# Altium PCB PCB1.PcbDoc
Units mm, origin at the board's own origin, x right, y up, seen from the top; angles counter-clockwise.
Board outline 59 x 63 mm, 2 copper layers (Top Layer, Bottom Layer); 26 components, 22 nets, 84 pads, 24 vias.
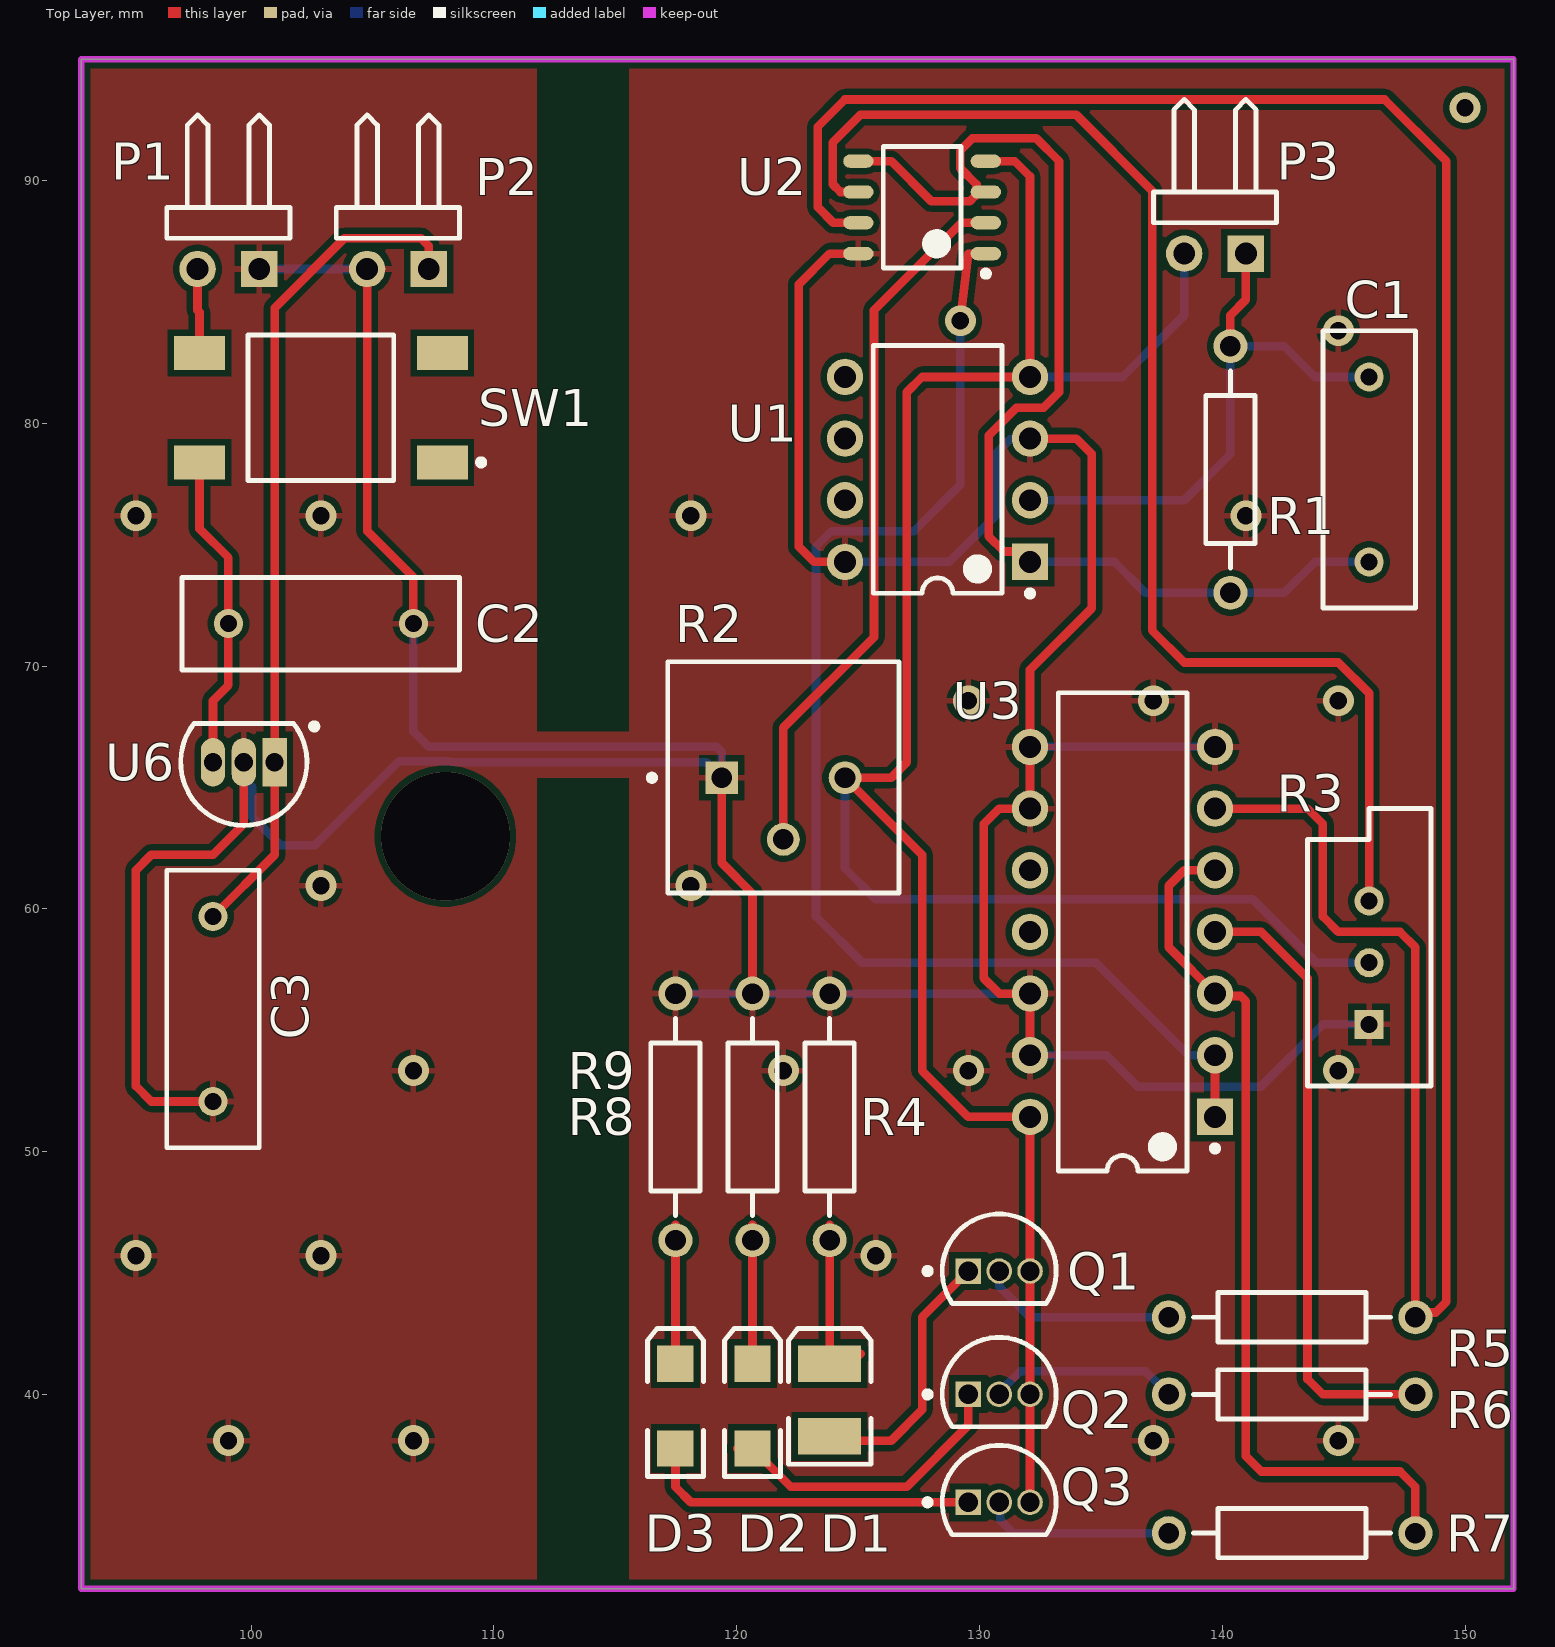
[diagram p0: Top Layer view]
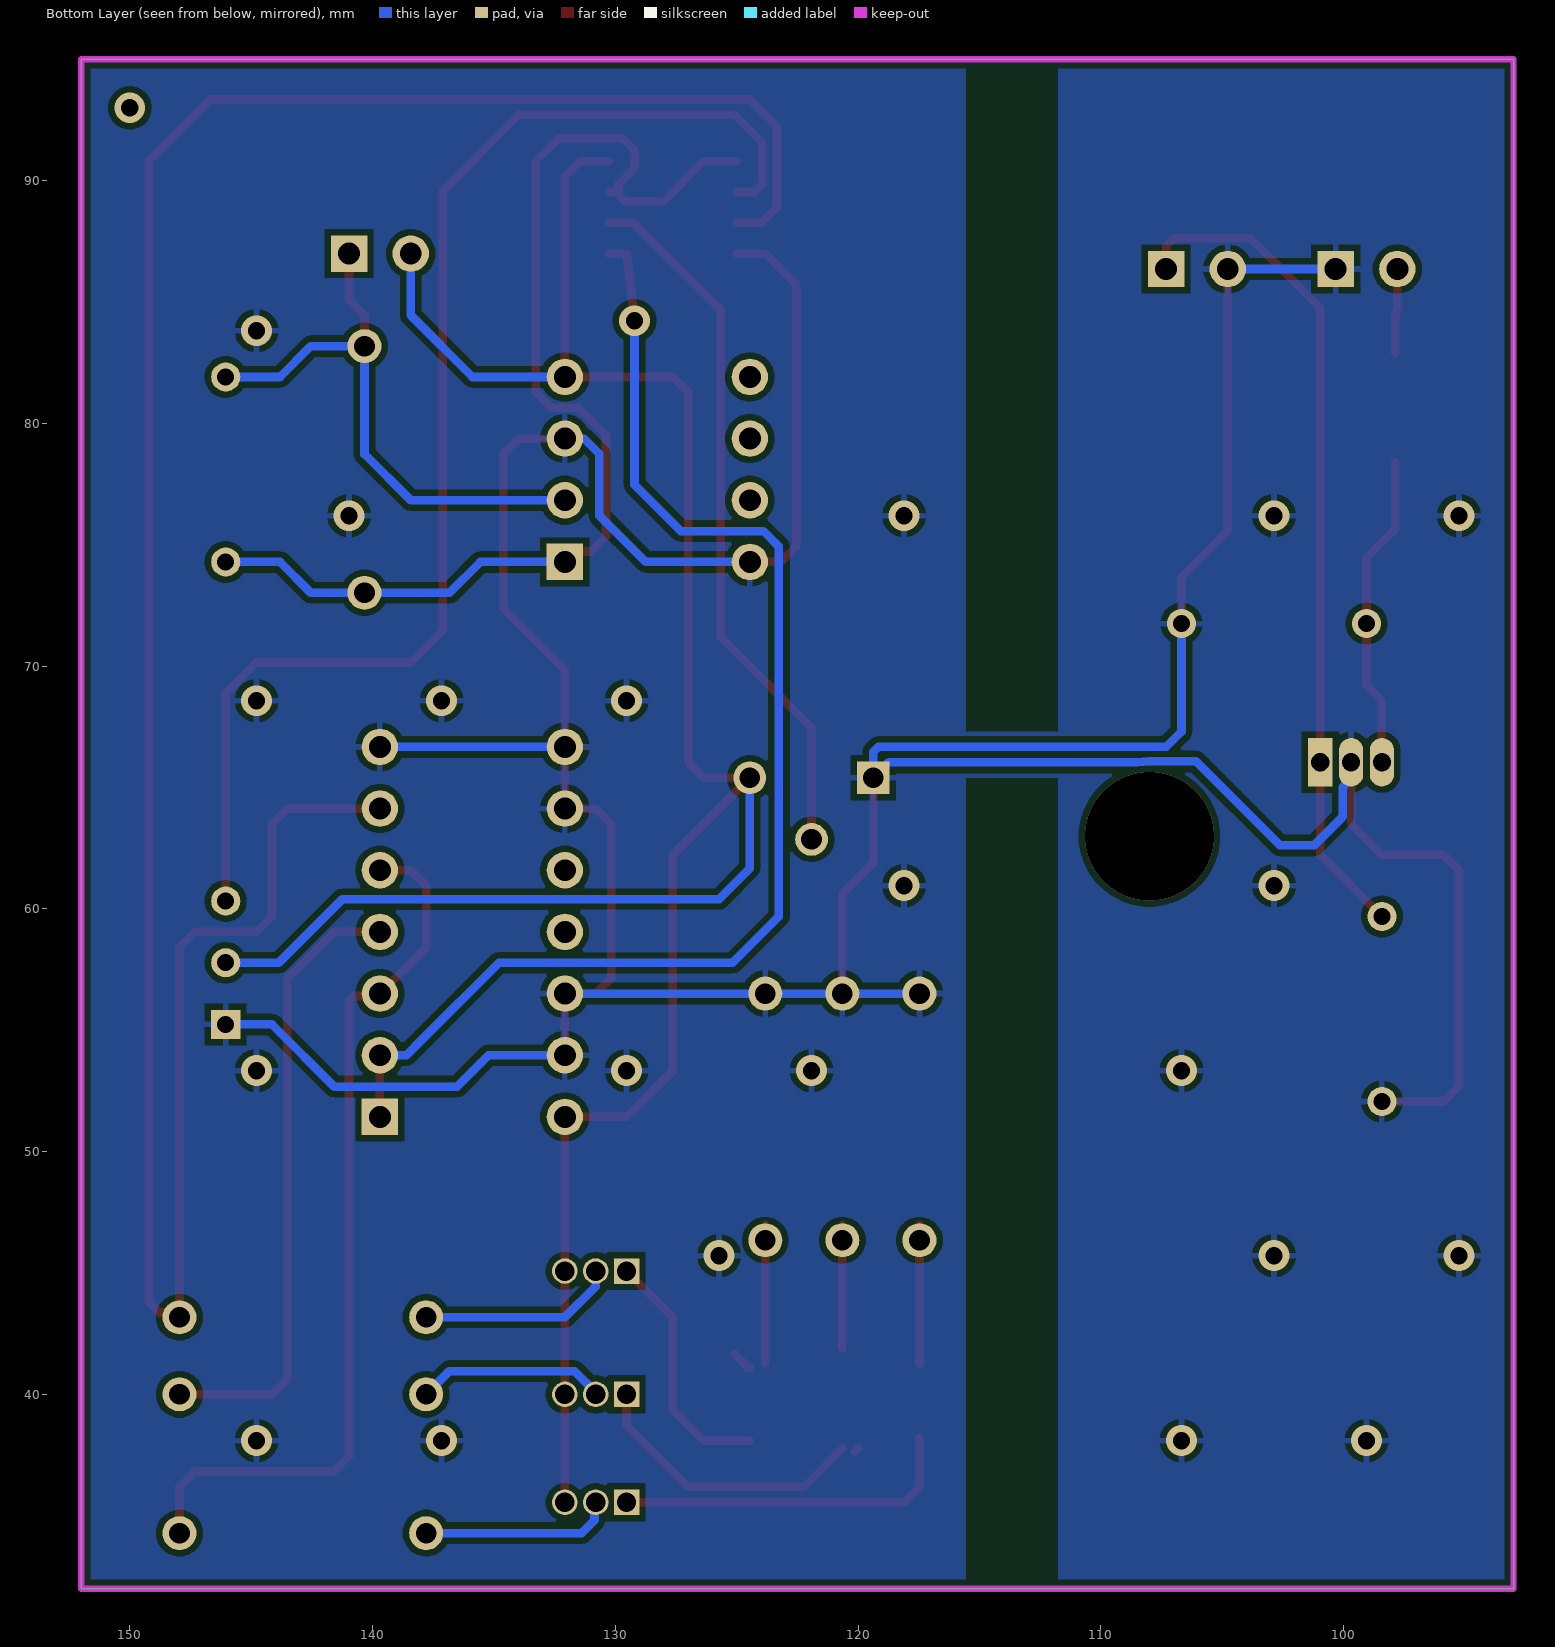
[diagram p1: Bottom Layer view, seen from below]

## Layer stack, top to bottom
Top Solder: solder mask 0.0102, Solder Resist, Dk 3.5
Top Layer: signal copper 0.0356
Dielectric 1: dielectric 0.32, FR-4, Dk 4.8
Bottom Layer: signal copper 0.0356
Bottom Solder: solder mask 0.0102, Solder Resist, Dk 3.5

## Board outline
93,32 93,45 93,95 152,95 152,32

## Design rules (kind name [scope] priority, off if disabled: settings)
Clearance [All] p1: gap=0.254 ignorepadtopadclearanceinfootprint=FALSE except(0: Arc-Hole Track-Hole SMDPad-Hole THPad-Hole Via-Hole Fill-Hole Poly-Hole Region-Hole Text-Hole)
PolygonConnect [All] p1: connectstyle=Relief reliefconductorwidth=0.254 reliefentries=4 polygonreliefangle="90 Angle" airgapwidth=0.254
RoutingVias [All] p1: holewidth=0.711 width=1.27 viastyle="Through Hole" minholewidth=0.711 minwidth=1.27 maxholewidth=0.711 maxwidth=1.27
SolderMaskExpansion [All] p1: expansion=0.102 istentingtop=FALSE
Width [All] p1: maxlimit=0.356 minlimit=0.356 preferedwidth=0.356 minimp=50.000000 maximp=50.000000 favimp=50.000000
30 further rules are at their usual default settings.

## Classes and differential pairs
component class Krupski_Konrad_Schemat_ideowy_mako103: C1 C2 C3 D1 D2 D3 P1 P2 P3 Q1 Q2 Q3 R1 R2 R3 R4 R5 R6 R7 R9 U1 U2 U3 U6

## Components (designator, comment, footprint, x,y, rotation, side; value= is the part's Value field where it differs from the comment)
C1 "Cap" RAD-0.3 146.05,78.105 r270 top value=10nF
C2 "Cap" RAD-0.3 102.87,71.755 r180 top value=0.47u
C3 "Cap" RAD-0.3 98.425,55.88 r90 top value=0.1u
D1 "LED3" 3.5X2.8X1.9 123.825,39.775 r90 top
D2 "LED2" 3.2X1.6X1.1 120.65,39.525 r90 top
D3 "LED2" 3.2X1.6X1.1 117.475,39.525 r90 top
P1 "Złącze baterii" HDR1X2H 100.33,86.36 r180 top
P2 "Header 2H" HDR1X2H 107.315,86.36 r180 top
P3 "Fotodioda" HDR1X2H 140.97,86.995 r180 top
Q1 "BC557C" ONSC-TO-92-3-29-11 130.81,45.085 r0 top
Q2 "BC557C" ONSC-TO-92-3-29-11 130.81,40.005 r0 top
Q3 "BC557C" ONSC-TO-92-3-29-11 130.81,35.56 r0 top
R1 "Res2" AXIAL-0.4 140.335,78.105 r270 top value=1Meg
R2 "3386P-1-104LF" BOUR-3386P 121.92,64.135 r0 top
R3 "RPot" VR5 146.05,57.785 r90 top value=1K
R4 "Res2" AXIAL-0.4 123.825,51.435 r270 top value=2K2
R5 "Res2" AXIAL-0.4 142.875,43.18 r0 top value=10K
R6 "Res2" AXIAL-0.4 142.875,40.005 r0 top value=10K
R7 "Res2" AXIAL-0.4 142.875,34.29 r0 top value=10K
R8 "Res2" AXIAL-0.4 120.65,51.435 r270 top value=2K2
R9 "Res2" AXIAL-0.4 117.475,51.435 r270 top value=2K2
SW1 "1301.9315.24" FP-1301_9315_24-MFG 102.87,80.645 r180 top
U1 "TL072CP" P0008A 128.27,78.105 r180 top
U2 "LM393DT" STM-SO-8_D_L 127.635,88.9 r180 top
U3 "CD4011BE" N0014A 135.89,59.055 r180 top
U6 "LM78L05ACZ" Z03A 99.695,66.04 r90 top

## Footprints (in the part's own frame and the unit in brackets; to place one, negate y for a bottom-side part, rotate by r counter-clockwise, add the part's x,y. Pads: shape width x height; smd on the part's side, far side on the other; paste and mask are expansions set on the pad)
3.2X1.6X1.1 [mm] "SMT LED; 2 Flat Leads"
  rect 1.5x1.5 smd: 1(-1.75,0) 2(1.75,0)
  silkscreen extent -2.9,-1.15 3.2,1.15
3.5X2.8X1.9 [mm] "SM LED; 2 C-Bend Leads; Body 3.5 x 2.8 x 1.9 mm, inc leads (LxWxH typ)"
  rect 1.5x2.6 smd: 1(-1.5,0) 2(1.5,0)
  silkscreen extent -2.65,-1.7 2.95,1.7
AXIAL-0.4 [mm] "Axial Device, Thru-Hole; 2 Leads; 0.4 in Pin Spacing"
  round 1.4 hole 0.85: 1(-5.08,0) 2(5.08,0)
  silkscreen extent -4.06,-1.02 4.06,1.02
BOUR-3386P [mm] "THD, 3-Leads, Body 9.53x9.53mm, Pitch 2.54mm"
  rect 1.35x1.35 hole 0.85: 1(-2.54,1.27)
  round 1.35 hole 0.85: 2(0,-1.27) 3(2.54,1.27)
  silkscreen extent -5.54,-3.48 4.76,6.05, body extent -4.79,-3.52 4.79,6.06, height 4.95
FP-1301_9315_24-MFG [mm]
  rect 2.1x1.4 smd paste+0 mask+0: 1(-5,2.25) 2(5,2.25) 3(-5,-2.25) 4(5,-2.25)
  silkscreen extent -6.73,-3 3,3, body extent -6.15,-3.1 6.15,3.1, height 0.25
HDR1X2H [mm] "Connector; Header; 2 Position; Right Angle"
  rect 1.5x1.5 hole 0.9: 1(0,0)
  round 1.5 hole 0.9: 2(2.54,0)
  silkscreen extent -1.27,-6.35 3.81,-1.27
N0014A [mm] "DIP, 14-Leads, Body 19.7x6.6mm, Pitch 2.54mm"
  rect 1.5x1.5 hole 0.9: 1(-3.81,7.62)
  round 1.5 hole 0.9: 2(-3.81,5.08) 3(-3.81,2.54) 4(-3.81,0) 5(-3.81,-2.54) 6(-3.81,-5.08) 7(-3.81,-7.62) 8(3.81,-7.62) 9(3.81,-5.08) 10(3.81,-2.54) 11(3.81,0) 12(3.81,2.54) 13(3.81,5.08) 14(3.81,7.62)
  silkscreen extent -3.94,-9.85 2.65,9.85, body extent -3.95,-9.85 3.95,9.85, height 5.08
ONSC-TO-92-3-29-11 [mm] "TO, 3-Leads, Body Dia 4.7mm, Pitch 1.27mm"
  rect 1.05x1.05 hole 0.8: 1(-1.27,0)
  round 1.05 hole 0.8: 2(0,0) 3(1.27,0)
  silkscreen extent -3.07,-1.34 2.35,2.35, body extent -2.35,-1.33 2.36,2.36, height 7.87
P0008A [mm] "DIP, 8-Leads, Body 10.15x6.6mm, Pitch 2.54mm"
  rect 1.5x1.5 hole 0.9: 1(-3.81,3.81)
  round 1.5 hole 0.9: 2(-3.81,1.27) 3(-3.81,-1.27) 4(-3.81,-3.81) 5(3.81,-3.81) 6(3.81,-1.27) 7(3.81,1.27) 8(3.81,3.81)
  silkscreen extent -3.94,-5.1 2.65,5.23, body extent -3.95,-5.07 3.95,5.07, height 5.08
RAD-0.3 [mm] "Radial Cap, Thru-Hole; 2 Leads; 0.3 in Pin Spacing"
  round 1.2 hole 0.7: 1(-3.81,0) 2(3.81,0)
  silkscreen extent -5.71,-1.91 5.71,1.91
STM-SO-8_D_L [mm] "SOIC, 8-Leads, Body 5x4mm, Pitch 1.27mm, IPC High Density"
  oval 1.25x0.55 smd: 1(-2.625,1.905) 2(-2.625,0.635) 3(-2.625,-0.635) 4(-2.625,-1.905) 5(2.625,-1.905) 6(2.625,-0.635) 7(2.625,0.635) 8(2.625,1.905)
  silkscreen extent -2.75,-2.5 1.6,2.85, body extent -3,-2.5 3,2.5, height 1.75
VR5 [mm] "Thru-Hole; 3 Leads"
  rect 1.2x1.2 hole 0.7: 1(-2.54,0)
  round 1.2 hole 0.7: 2(0,0) 3(2.54,0)
  silkscreen extent -5.08,-2.54 6.35,2.54
Z03A [mm] "TO, Flat Index; 3 In-Line, Axial Leads; Body Dia. 5mm; Leads 0.55 x 0.50 mm (max)"
  rect 2x1 hole 0.75: 1(0,-1.27)
  oval 2x1 hole 0.75: 2(0,0) 3(0,1.27)
  silkscreen extent -2.6,-3.03 1.6,2.6, body extent -2.6,-2.61 1.6,2.61, height 5.2

## Part data
C1 C2 C3: "Capacitor", LatestRevisionDate=17-Jul-2002, LatestRevisionNote="Re-released for DXP Platform.", PackageDescription="Radial Cap, Thru-Hole; 2 Leads; 0.3 in Pin Spacing", PackageReference=RAD-0.3, Published=8-Jun-2000, Publisher="Altium Limited"
D1: "Typical BLUE SiC LED", DatasheetVersion=16-Apr-2002, LatestRevisionDate=17-Dec-2003, LatestRevisionNote="PCB Footprint replaced.", PackageDescription="SM LED; 2 C-Bend Leads; Body 3.5 x 2.8 x 1.9 mm, inc leads (LxWxH typ)", PackageReference=3.5X2.8X1.9, PackageVersion=16-Apr-2002, Published=8-Jun-2000, Publisher="Altium Limited"
D2 D3: "Typical RED, GREEN, YELLOW, AMBER GaAs LED", LatestRevisionDate=17-Jul-2002, LatestRevisionNote="Re-released for DXP Platform.", PackageDescription="SM LED; 2 Flat Leads", PackageReference=3.2X1.6X1.1, PackageVersion=Feb-2002, Published=8-Jun-2000, Publisher="Altium Limited"
P1 P3: library part "Header 2H", "Header, 2-Pin, Right Angle", LatestRevisionDate=17-Jul-2002, LatestRevisionNote="Re-released for DXP Platform.", Publisher="Altium Limited"
P2: "Header, 2-Pin, Right Angle", LatestRevisionDate=17-Jul-2002, LatestRevisionNote="Re-released for DXP Platform.", Publisher="Altium Limited"
Q1 Q2 Q3: library part CMP-1048-01449-1, "Amplifier Transistor, PNP Silicon, 3-Pin TO-92, Bulk Box", Manufacturer="On Semiconductor", ComponentLink1Description="Manufacturer URL", ComponentLink1URL=http://www.onsemi.com/, ComponentLink2Description=Datasheet, ComponentLink2URL=http://www.onsemi.com/pub_link/Collateral/BC556B-D.PDF, ComponentLink3Description="Package Specification", ComponentLink3URL=http://www.onsemi.cn/pub_link/Collateral/2N6426-D.PDF, DatasheetVersion="Rev. 3", IC Continuous (A)=-0.1, Mounting Technology="Through Hole", PackageDescription="3-Pin Transistor Outline, Body 4.825 x 3.685 mm, Pitch 1.27 mm", PackageReference=TO-92-3-29-11_AM_SL, PackageVersion="Rev. AM", Packing="Bulk Box", PartNumber=BC557C, Polarity=PNP, RoHS=FALSE
R1 R4 R5 R6 R7 R8 R9: "Resistor", LatestRevisionDate=17-Jul-2002, LatestRevisionNote="Re-released for DXP Platform.", PackageDescription="Axial Device, Thru-Hole; 2 Leads; 0.4 in Pin Spacing", PackageReference=AXIAL-0.4, Published=8-Jun-2000, Publisher="Altium Limited"
R2: library part CMP-2000-05592-1, "Square Trimpot(R) Trimming Potentiometer, 100 KOhm, +/- 10%, 0.5 W, -55 to 125 degC, 3-Pin THD, RoHS, Tube", Manufacturer=Bourns, Manufacturer Series=3386, Maximum Operating Temperature=125C, Minimum Operating Temperature=-55C, Operating Temperature-Max (Cel)=125, Operating Temperature-Min (Cel)=-55, Package=RectangularPackage, Package Description="3-Pin Through Hole Device, Body 9.53 x 9.53 mm, Pitch 2.54 mm", Package Reference=3386P, Power Rating=1/2W, Rated Power Dissipation (P) (W)=0.5, Rated Temperature (Cel)=85, Resistance (ohm)=100000, Resistance Law=Linear, Resistance Value=100KOhm, Resistive Element Material=Cermet, Temperature Coefficient=100ppm/C, Tolerance=10%, Tolerance (%)=10, Actuator Orientation=Vertical, Actuator Type=Screw, Datasheet URL=http://www.bourns.com/docs/Product-Datasheets/3386.pdf, Datasheet Version=05/2016, Family=3386, Lead Free=NO, Manufacturer URL=http://www.bourns.com/, Mounting=ThroughHole, Mounting Feature=ThroughHole, Mounting Technology=ThroughHole, Number of Terminals=3, Number of Turns=1, Packaging=Tube, Product Depth=9.53mm, Product Height=4.83mm, Product Length=9.53mm, Product Type=Potentiometer, Shaft Diameter=3.15mm, Technology=Cermet, Terminal Finish=TINLEAD, Terminal Shape=WIRE, Termination Style=Pin, Type=Trimmer
R3: "Potentiometer", LatestRevisionDate=17-Jul-2002, LatestRevisionNote="Re-released for DXP Platform.", PackageDescription="Variable Resistor, Thru-Hole; 3 Leads", PackageReference=VR5, Published=8-Jun-2000, Publisher="Altium Limited", Set Position=0.5, Sim Note="Enter the Resistance value and the set point into parameter fields."
SW1: library part CMP-26321-000002-1, "SWITCH TACTILE SPST-NO 0.05A 12V", Case/Package=SMD/SMT, Current Rating=50mA, Max Operating Temperature=70°C, Max Voltage Rating (DC)=12V, Min Operating Temperature=-20°C, Operating Force=1.6N, Package Quantity=1000, Ratings=IP40, Actuator Type=Standard, Contact Plating=Silver, Depth=10mm, Illumination Type=Illuminated, Length=6mm, Max Current Rating=50mA, Mechanical Life=100000Cycles, Mount="Surface Mount", Orientation=Straight, Packaging="Tape and Reel", Radiation Hardening=No, REACH SVHC="No SVHC", RoHS Compliant=Yes, Series=LSH, Switch Function=Off-Mom, Switch Travel=0.25mm, Termination="Gull Wing", Throw Configuration=SPST, Voltage Rating (AC)=12V, Voltage Rating (DC)=12V
U1: library part CMP-0017-00950-2, "Dual Low-Noise JFET-Input General-Purpose Operational Amplifier, 7 to 36 V, 0 to 70 degC, 8-pin DIP (P8), Pb-Free (RoHS)", Manufacturer="Texas Instruments", Rating=Catalog, Total Supply Voltage(Max)(+5V is 5, +/-5V is 10)=36, Total Supply Voltage(Min)(+5V is 5, +/-5V is 10)=7, CMRR(Min)(dB)=70, Code_JEDEC=MS-001, ComponentLink1Description="Manufacturer URL", ComponentLink1URL=http://www.ti.com/, ComponentLink2Description=Datasheet, ComponentLink2URL=http://www.ti.com/lit/ds/symlink/tl072.pdf, ComponentLink3Description="Package Specification", ComponentLink3URL=http://www.ti.com/litv/pdf/mpdi001b, DatasheetVersion=SLOS080J, Eco-Plan="Pb-Free (RoHS)", GBW(Typ)(MHz)=3, IIB(Max)(pA)=200, Iq per channel(Max)(mA)=2.5, Mounting Technology="Through Hole", Number of Channels=2, Offset Drift(Typ)(uV/C)=18, PackageDescription="8-Pin Plastic In-Line, Body 9.59 x 6.35 mm, Pitch 2.54 mm", PackageReference=P0008A, PackageVersion="4040082/E, 04/2010", PartNumber=TL072CP, Slew Rate(Typ)(V/us)=13, Sub Family="General Purpose Amplifier, High Supply Voltage Amplifier (>=30V)", Vio (25C)(Max)(mV)=10, Vn at 1kHz(Typ)(nV/rtHz)=18
U2: library part CMP-2000-06550-1, "Low-Power, Dual-Voltage Comparator, 2 to 36 V, 0 to 70 degC, 8-Pin SOIC (SO), RoHS, Tape and Reel", Current - Input Bias (Max)=0.25µA@5V, Current - Output (Typ)=18mA@5V, Current - Quiescent (Max)=2.5mA, Manufacturer=STMicroelectronics, Operating Temperature=0°C~70°C, Package / Case="8-SOIC(0.154\",3.90mmWidth)", Package Description="8-Pin Small Outline Integrated Circuit, Body 4.9 x 3.9 mm, Pitch 1.27 mm", Package Reference=SO-8, Standard Package=2,500, Supplier Device Package=8-SO, Voltage - Input Offset (Max)=5mV@30V, Voltage - Supply, Single/Dual (±)=2V~36V,±1V~18V, Category=IntegratedCircuits(ICs), Datasheet URL=http://www.st.com/content/ccc/resource/technical/document/datasheet/group1/b4/cc/cf/13/18/28/44/f5/CD00000465/files/CD00000465.pdf/jcr:content/translations/en.CD00000465.pdf, Datasheet Version="Rev. 15, 02/2016", EDA / CAD Models=DownloadfromAcceleratedDesigns, Family=Linear-Comparators, Manufacturer URL=http://www.st.com/, Mounting Technology=SurfaceMount, Mounting Type=SurfaceMount, Number of Elements=2, Online Catalog=Comparators-2elements, Other Names=497-1593-2, Other Related Documents=LM393ViewAllSpecificationsLM393ViewAllSpecifications, Output Type=CMOS,DTL,ECL,MOS,Open-Collector,TTL, Packaging=Tape&Reel(TR), Type=GeneralPurpose
U3: library part CMP-1627-00488-2, "CMOS Quad 2-Input NAND Gate, N0014A, TUBE", F @ Nom Voltage(Max)(Mhz)=8, Generic Part Number=CD4011B, ICC @ Nom Voltage(Max)(mA)=0.015, Manufacturer="Texas Instruments", Operating Temperature Range(C)="-55 to 125", Rating=Military, Voltage(Nom)(V)=10, Bits(#)=4, Code_JEDEC=MS-001, DatasheetVersion=SCHS021D, Input Type=CMOS, Output Drive (IOL/IOH)(Max)(mA)=1.5/-1.5, Output Type=CMOS, PackageReference=N0014A, Schmitt Trigger=No, Technology Family=CD4000, VCC(Max)(V)=18, VCC(Min)(V)=3
U6: library part CMP-0062-00042-2, "3-Terminal Positive Regulators, 3-pin TO-92", Manufacturer="National Semiconductor", PackageTopMarking=NSXYTT*LM78L*05ACZ, PowerWise=N, Code_JEDEC=TO-226-AA, ComponentLink1Description="LM78L05 Datasheet", ComponentLink1URL=http://www.national.com/ds/LM/LM78L05.pdf, ComponentLink2Description="LM78L05 Web Page", ComponentLink2URL=http://www.national.com/pf/LM/LM78L05.html, ComponentLink3Description="Z03A Package Page", ComponentLink3URL=http://www.national.com/packaging/folders/z03a.html, CompType="LDO IC", DatasheetVersion=Apr-2006, PackageDescription="TO-92, Molded, 3 Lead", PackageReference=Z03A, PackageVersion="revG, Sep-2000", PinCount=3, RevisionNote="Component URLs added", RoHS=N

## Via types
v1: diameter 1.27, hole 0.711, Top Layer to Bottom Layer, 23 vias
v2: diameter 5.3, hole 5.3, Top Layer to Bottom Layer, 1 vias

## Nets (pads, with @x,y where several pads share a name; then routed paths per layer and width w, separated by ;. In a path a pad name is that pad's centre, name@x,y a point inside that pad or via, vN(x,y) a via of type N, cw(c..) or ccw(c..) an arc to the next point about the centre after c; other vN are vias at no path point)
+5V: P3.2 Q1.3 Q2.3 Q3.3 R2.3 R3.2 U1.4 U2.4 U3.14 | length 105.1
  Top Layer w0.356: U2.4 131.445,90.805 132.08,90.17 U1.4 127.635,81.915 127,81.28 127,66.04 126.365,65.405 R2.3 127.635,62.23 127.635,53.34 129.54,51.435 U3.14 Q1.3 Q2.3 132.08,37.77 Q3.3
  Bottom Layer w0.356: R2.3 124.46,61.671 125.73,60.401 141.249,60.401 143.866,57.785 R3.2 ; U1.4 135.89,81.915 138.43,84.455 P3.2
GND: C2.1 C3.1 P1.1 P2.2 R2.1 R3.1 R4.1 R8.1 R9.1 U1.3 U1.8 U2.8 U3.7 U3.8 U3.9 U3.12 U3.13 U6.2 | length 187.8
  Top Layer w0.356: C3.1 95.885,52.07 95.25,52.705 95.25,61.595 95.885,62.23 98.425,62.23 99.695,63.5 U6.2 ; P2.2 104.775,75.565 106.68,73.66 C2.1 ; R2.1 119.38,61.9 120.65,60.63 R8.1@120.65,57.15 ; U1.8 123.19,74.295 122.555,74.93 122.555,85.725 123.825,86.995 U2.8 ; U3.13 U3.12 130.81,56.515 130.175,57.15 130.175,63.5 130.81,64.135 U3.9 U3.8 132.08,69.85 134.62,72.39 134.62,78.74 133.985,79.375 U1.3
  Bottom Layer w0.356: U6.2 99.695,65.366 100.033,65.027 100.033,63.797 101.209,62.621 102.626,62.621 106.087,66.082 108,66.082 cw(c108,63) 108.506,66.04 118.745,66.04 R2.1 119.38,66.467 119.172,66.675 107.315,66.675 106.68,67.31 C2.1 ; P1.1 P2.2 ; R9.1 R8.1 R4.1 U3.12 ; U1.8 128.753,74.295 130.658,76.2 130.658,78.74 131.293,79.375 U1.3 ; U3.13 135.23,53.975 136.525,52.68 141.58,52.68 144.145,55.245 R3.1 ; U3.8 U3.7
  other v1: 99.06,38.1 106.68,38.1 137.16,38.1 144.78,38.1 95.25,45.72 102.87,45.72 125.73,45.72 106.68,53.34 121.92,53.34 129.54,53.34 144.78,53.34 102.87,60.96 118.11,60.96 129.54,68.58 137.16,68.58 144.78,68.58 95.25,76.2 102.87,76.2 118.11,76.2 140.97,76.2 144.78,83.82
NetC1_1: C1.1 P3.1 R1.1 U1.2 | length 23.8
  Top Layer w0.356: R1.1 140.335,84.455 140.97,85.09 P3.1
  Bottom Layer w0.356: U1.2 138.43,76.835 140.335,78.74 R1.1 142.545,83.185 143.815,81.915 C1.1
NetC1_2: C1.2 R1.2 U1.1 U2.3 U2.5 | length 47.6
  Top Layer w0.356: U2.5 126.365,90.805 128.015,89.155 129.604,89.155 129.813,89.363 129.813,89.385 U2.3@129.963,89.535 ; U2.3@129.873,89.535 U2.3 U2.3@129.963,89.535 ; U1.1 131.65,74.725 131.005,74.725 130.383,75.347 130.383,79.507 131.521,80.645 132.639,80.645 133.274,81.28 133.274,90.805 132.334,91.745 129.71,91.745 129.203,91.238 129.203,90.512 129.873,89.843 129.873,89.625 U2.3@129.963,89.535
  Bottom Layer w0.356: U1.1 135.56,74.295 136.83,73.025 R1.2 142.545,73.025 143.815,74.295 C1.2
NetC2_2: C2.2 SW1.2 U6.3 | length 13.1
  Top Layer w0.356: SW1.2 97.87,75.663 99.06,74.473 C2.2 99.06,69.215 98.425,68.58 U6.3
NetC3_2: C3.2 P2.1 U6.1 | length 34.7
  Top Layer w0.356: C3.2 100.965,62.23 U6.1 100.965,84.76 103.835,87.63 106.998,87.63 107.315,87.312 P2.1
NetD1_1: D1.1 Q1.1 | length 10.2
  Top Layer w0.356: D1.1@124.46,38.1 126.365,38.1 127.635,39.37 127.635,43.18 Q1.1
NetD1_2: D1.2 R4.2 | length 6.6
  Top Layer w0.356: D1.2 R4.2@123.825,46.99 ; D1.2@124.46,41.1 124.523,41.1 D1.2@125.095,41.672
NetD2_1: D2.1 Q2.1 | length 12.1
  Top Layer w0.356: D2.1@120.015,37.775 D2.1@120.145,37.645 ; D2.1 122.23,36.195 127,36.195 129.54,38.735 Q2.1
NetD2_2: D2.2 R8.2 | length 5.1
  Top Layer w0.356: D2.2@120.65,41.91 120.65,43.815 R8.2@120.65,46.99
NetD3_1: D3.1 Q3.1 | length 14.4
  Top Layer w0.356: D3.1@117.475,38.219 117.475,36.195 118.11,35.56 Q3.1
NetD3_2: D3.2 R9.2 | length 5.7
  Top Layer w0.356: D3.2 R9.2@117.475,46.99
NetP1_2: P1.2 SW1.4 | length 3.5
  Top Layer w0.356: P1.2 97.79,84.662 97.87,84.582 SW1.4
NetQ1_2: Q1.2 R5.1 | length 8.1
  Bottom Layer w0.356: Q1.2 130.81,44.45 132.08,43.18 R5.1
NetQ2_2: Q2.2 R6.1 | length 7.8
  Bottom Layer w0.356: Q2.2 130.81,40.088 131.684,40.962 136.838,40.962 R6.1
NetQ3_2: Q3.2 R7.1 | length 7.9
  Bottom Layer w0.356: Q3.2 130.86,35.51 130.86,34.824 131.394,34.29 R7.1
NetR2_2: R2.2 U2.2 | length 29.4
  Top Layer w0.356: R2.2 121.92,67.462 125.654,71.196 125.654,84.658 129.261,88.265 U2.2
NetR3_3: R3.3 U2.6 | length 54.5
  Top Layer w0.356: U2.6 124.27,89.535 123.952,89.852 123.952,91.567 125.095,92.71 133.985,92.71 137.109,89.586 137.109,71.476 138.43,70.155 144.78,70.155 146.05,68.885 R3.3
NetR5_2: R5.2 U2.7 U3.6 | length 109.2
  Top Layer w0.356: U2.7 123.977,88.265 123.342,88.9 123.342,92.227 124.46,93.345 146.685,93.345 149.225,90.805 149.225,43.815 148.789,43.379 148.154,43.379 R5.2 ; U3.6 143.51,64.135 144.145,63.5 144.145,59.69 144.78,59.055 147.32,59.055 147.955,58.42 R5.2@147.955,43.276
NetR6_2: R6.2 U3.4 | length 25.8
  Top Layer w0.356: U3.4 141.605,59.055 143.51,57.15 143.51,40.64 144.145,40.005 R6.2
NetR7_2: R7.2 U3.3 U3.5 | length 37
  Top Layer w0.356: U3.5 138.43,61.595 137.795,60.96 137.795,58.42 139.801,56.414 140.762,56.414 140.97,56.206 140.97,37.465 141.605,36.83 147.32,36.83 147.955,36.195 R7.2
NetU2_1: U2.1 U3.1 U3.2 | length 53.8
  Top Layer w0.356: v1(129.21,84.226) 129.54,86.995 U2.1 ; U3.1 U3.2
  Bottom Layer w0.356: v1(129.21,84.226) 129.21,77.47 127.305,75.565 123.901,75.565 123.266,74.93 123.266,59.69 125.171,57.785 134.798,57.785 137.973,54.61 138.608,53.975 U3.2
pads on no net: SW1.1 SW1.3 U1.5 U1.6 U1.7 U3.10 U3.11
copper on no net:
  other v1: 150,93
  other v2: 108,63

## Polygon pours and split planes (outlines as drawn)
GND on Top Layer "GND_L01_P000" (solid, pour order 0): 93,32 93.129,95.129 111.76,95 111.76,67.31 115.57,67.31 115.57,95.08 152,95 152,32 115.57,32 115.57,65.405 111.76,65.405 111.76,32
GND on Bottom Layer "GND_L02_P001" (solid, pour order 1): 93.345,94.615 111.76,94.615 111.76,67.31 115.57,67.31 115.57,94.615 151.765,94.615 151.765,32.385 115.57,32.385 115.57,65.405 111.76,65.405 111.76,32.385 93.345,32.385

## Keep-outs
Keep-Out Layer:
  the board outline again, w0.254